# Altium PCB ControlBoard_v4.PcbDoc (part 2 of 2)
Units mm, origin at the board's own origin, x right, y up, seen from the top; angles counter-clockwise.
Board outline 111.5 x 182 mm, 2 copper layers (Top Layer, Bottom Layer); 154 components, 123 nets, 669 pads, 187 vias.
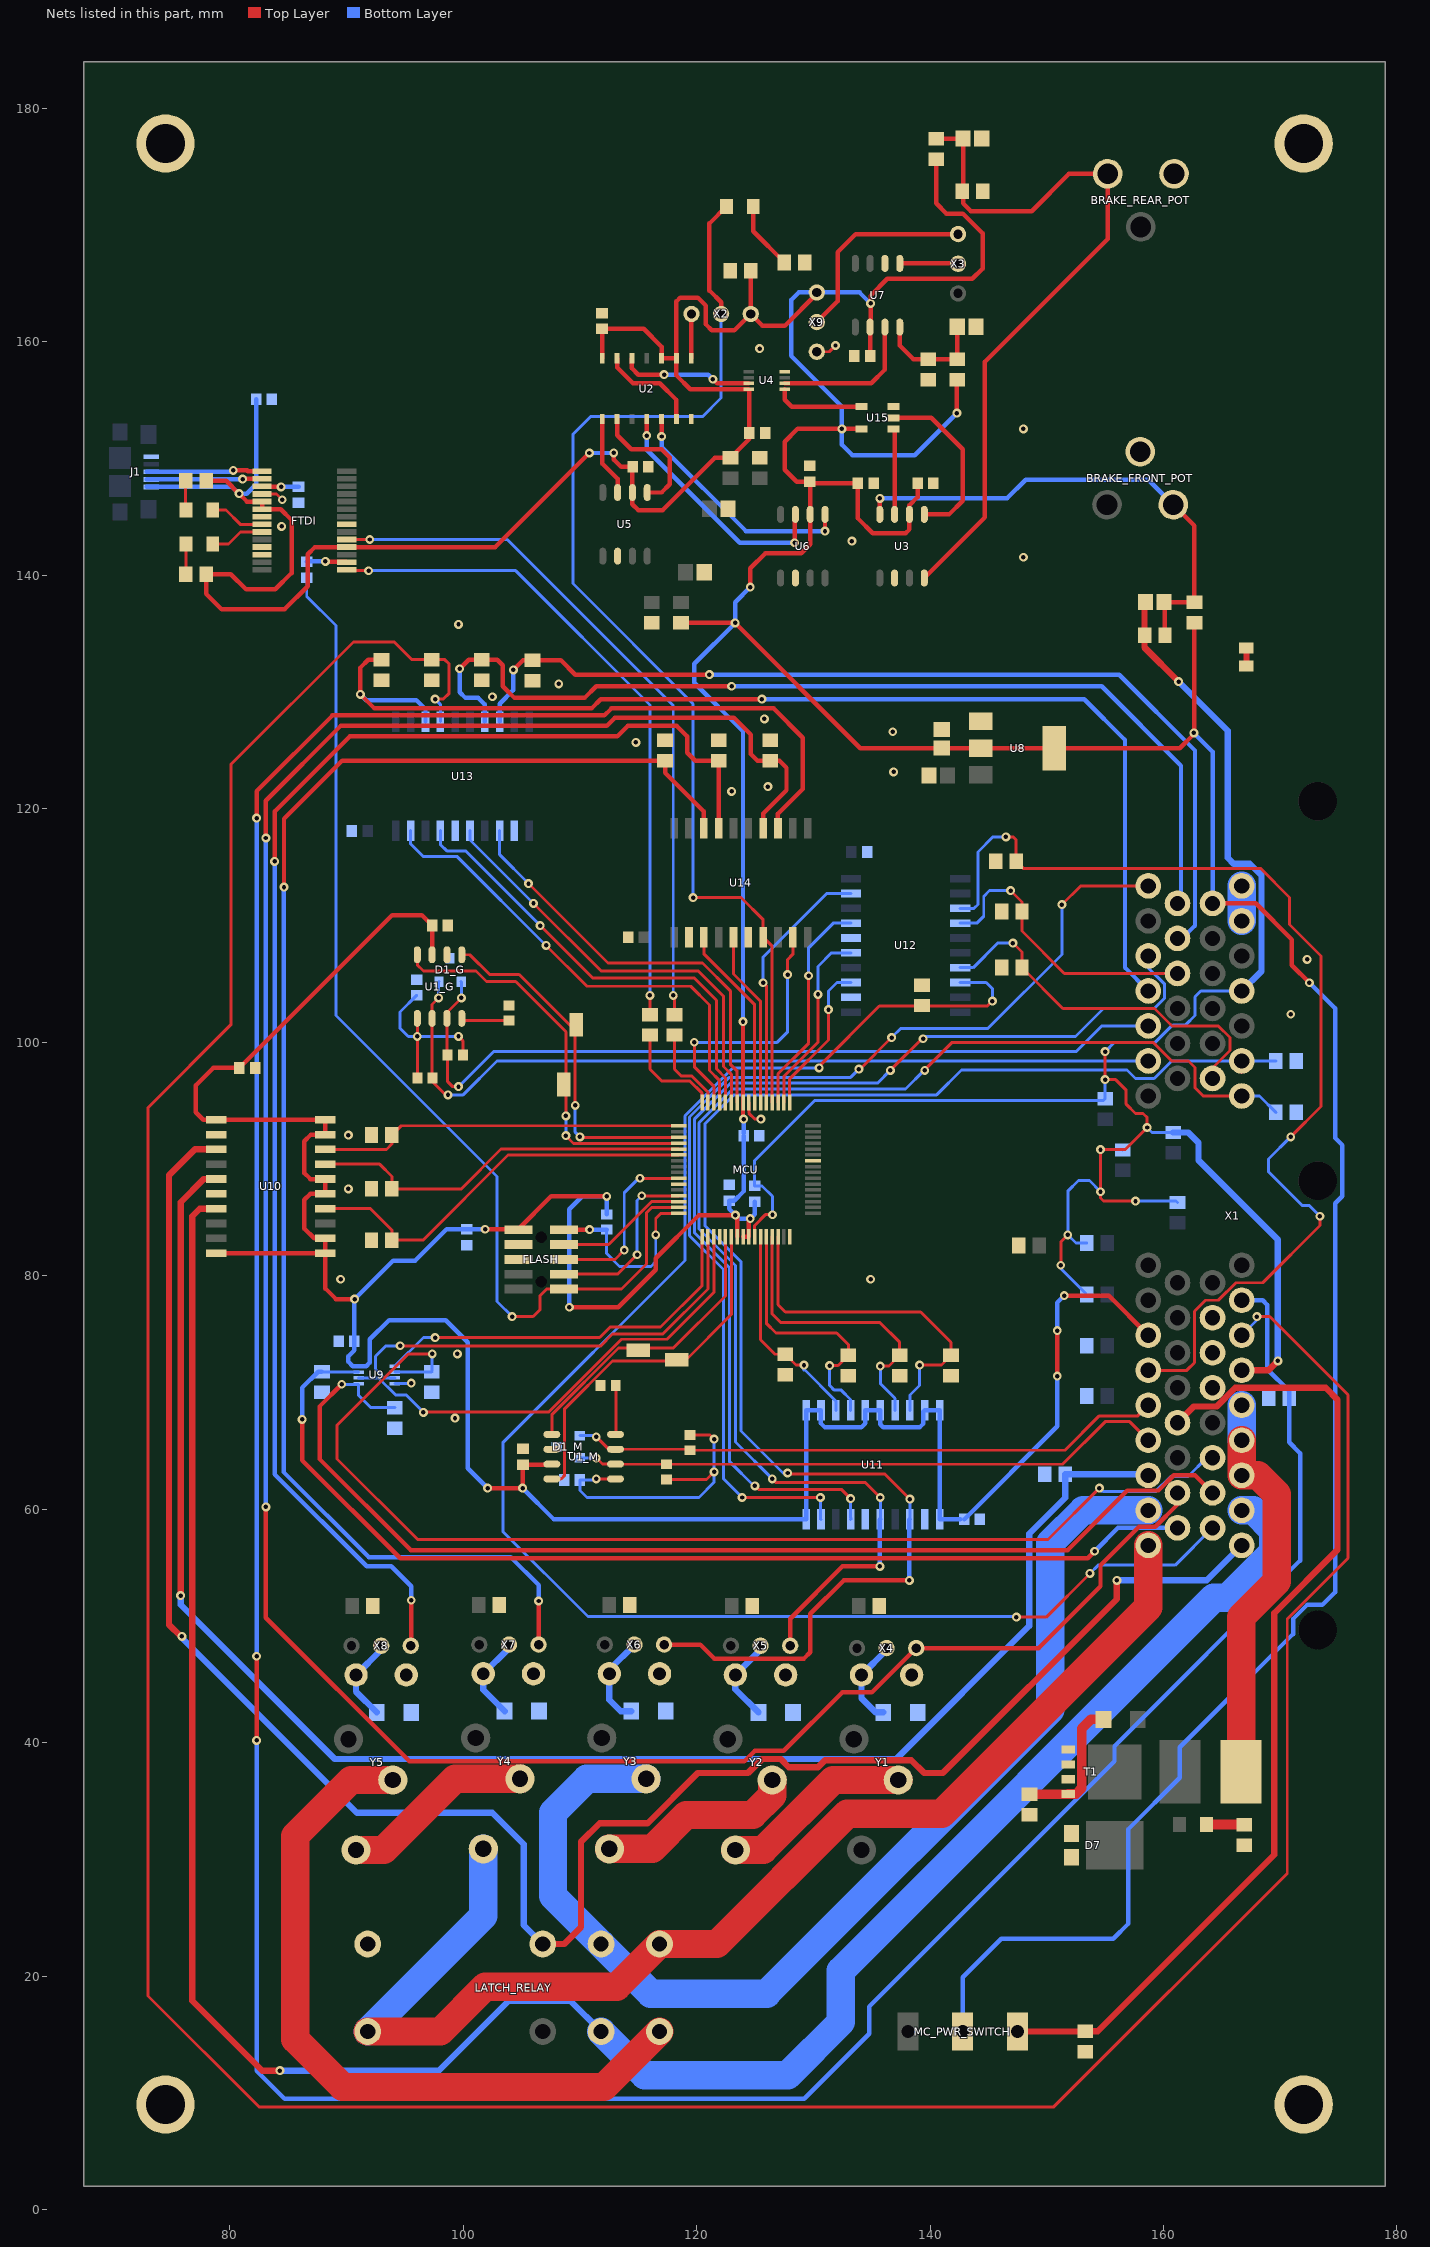
[diagram p2: the nets of this part, all layers, seen from the top]

## Via types
v1: diameter 0.762, hole 0.381, Top Layer to Bottom Layer, 185 vias
v2: diameter 2.54, hole 1.24, Top Layer to Bottom Layer, 2 vias

## Nets (pads, with @x,y where several pads share a name; then routed paths per layer and width w, separated by ;. In a path a pad name is that pad's centre, name@x,y a point inside that pad or via, vN(x,y) a via of type N, cw(c..) or ccw(c..) an arc to the next point about the centre after c; other vN are vias at no path point) (continued)
AGND: BRAKE_FRONT_POT.2 BRAKE_REAR_POT.3 C7.1 C12.1 C13.1 C14.1 C15.1 C17.1 C18.1 C19.1 C20.1 C21.1 C22.1 C29.1 C30.1 MCU.10 N1.2 R8.1 R9.1 R10.1 R11.1 R13.2 R14.1 R16.2 R17.1 R20.1 R22.1 R23.2 R25.1 R60.1 U2.7 U3.2 U4.4 U5.2 U6.2 U7.2 U15.3 X1.A31 X1.B23 X9.3 | length 169.8
  Top Layer w0.254: MCU.10@124.975,83.35 124.975,84.314 125.89,85.229 v1(126.5,85.229) ; X9.3@130.3,159.16 131.365,159.16 v1(131.9,159.695) ; v1(151.2,80.9) 151.2,82.9 v1(151.8,83.5) ; v1(155,99.2) v1(155,96.8) 155.9,96.8 156.8,95.9 156.8,94.7 157.6,93.9 158.25,93.9 158.6,93.55 v1(158.6,92.7) 156.7,90.8 v1(154.6,90.8) v1(154.6,87.2) 154.6,86.65 154.85,86.4 v1(157.6,86.4)
  Top Layer w0.543: C14.1@158.45,137.724 158.375,137.649 R10.1@158.375,134.874 158.375,133.825 v1(161.3,130.9) ; X1.A31@166.7,71.9 169,71.9 v1(169.8,72.7)
  Bottom Layer w0.254: v1(126.5,85.229) 126.5,86.8 125.61,87.69 C7.1@124.975,87.69 124.975,89.875 130.1,95 154.825,95 R14.1@155,95.175 v1(155,96.8) ; v1(151.2,80.9) 151.2,80.625 R23.2@153.425,78.4 ; R13.2@153.425,82.8 152.5,82.8 v1(151.8,83.5) 151.8,87.24 152.71,88.15 153.65,88.15 v1(154.6,87.2) ; v1(154.6,90.8) 156.475,90.8 R22.1@156.5,90.775 ; v1(155,99.2) 155.8,100 159.3,100 160.8,101.5 161.9,101.5 162.7,102.3 162.7,103.9 163.2,104.4 X1.B23@166.7,104.4 ; v1(157.6,86.4) 161.075,86.4 R16.2@161.2,86.275 ; v1(158.6,92.7) 159.025,92.275 R20.1@160.84,92.275
  Bottom Layer w0.543: R20.1@160.84,92.275 162.125,92.275 163,91.4 163,89.9 169.8,83.1 v1(169.8,72.7) ; v1@161.35,130.85 165.5,126.7 165.5,115.8 166,115.3 167.4,115.3 168.4,114.3 168.4,106.1 X1.B23@166.7,104.4
  other v1: 148,141.554 133.3,142.934 148,152.55 125.4,159.423
AIR+_5V: MCU.34 U12.5 | length 16.2
  Top Layer w0.254: MCU.34@127.475,94.85 127.475,97.075 130.4,100 v1(130.4,104.1)
  Bottom Layer w0.254: v1(130.4,104.1) 130.4,106.5 131.565,107.665 U12.5@133.225,107.665
AIR+_12V: R48.2 U12.17 X1.B14 | length 32.2
  Top Layer w0.254: v1(147.1,108.5) 147.875,107.725 R48.2@147.875,106.4 151.375,102.9 159.225,102.9 160.725,101.4 164.7,101.4 165.7,100.4 165.7,99.3 164.2,97.8 X1.B14@164.2,96.9
  Bottom Layer w0.254: U12.17@142.575,106.395 143.695,106.395 145.8,108.5 v1(147.1,108.5)
AIR-_5V: MCU.35 U12.7 | length 18.8
  Top Layer w0.254: MCU.35@126.975,94.85 126.975,97.3 129.6,99.925 v1(129.6,105.7)
  Bottom Layer w0.254: v1(129.6,105.7) 129.6,108.1 131.705,110.205 U12.7@133.225,110.205
AIR-_12V: R49.2 U12.14 X1.B11 | length 25.2
  Top Layer w0.254: v1(146.9,113) 147.875,112.025 R49.2@147.875,111.2 147.875,109.525 151.5,105.9 X1.B11@161.2,105.9
  Bottom Layer w0.254: U12.14@142.575,110.205 144.005,110.205 144.6,110.8 144.6,112.5 145.1,113 v1(146.9,113)
BMS_OK: R15.1 U11.5 X1.B20 X5.1 | length 116.6
  Top Layer w0.254: v1(126.48,62.6) 126.78,62.3 134.435,62.3 v1(135.735,61) ; v1(139.545,97.6) 139.545,97.645 141.9,100 159.1,100 160.7,98.4 162.15,98.4 162.7,97.85 162.7,96.1 163.4,95.4 X1.B20@166.7,95.4
  Top Layer w0.381: X5.1@128.015,48.3 128.015,50.615 132.5,55.1 v1(135.695,55.1)
  Bottom Layer w0.254: v1(126.48,62.6) 123.325,65.755 123.325,80.875 120.2,84 120.2,93.1 123.1,96 137.9,96 139.5,97.6 v1(139.545,97.6) ; U11.5@135.735,59.125 v1(135.735,61) ; X1.B20@166.7,95.4 168.225,95.4 R15.1@169.625,94
  Bottom Layer w0.381: v1(135.695,55.1) 135.695,59.085 U11.5@135.735,59.125
BMS_OK_5V: MCU.13 R44.2 U11.17 | length 26
  Top Layer w0.254: MCU.13@126.475,83.35 126.475,76.725 127.2,76 135.7,76 137.4,74.3 R44.2@137.4,73.175 136.49,72.265 v1(135.735,72.265)
  Bottom Layer w0.254: v1(135.735,72.265) 135.735,70.765 137.005,69.495 U11.17@137.005,68.475
BMS_OK_OUT: D2.2 X5.2 Y2.COIL1 | length 7.4
  Bottom Layer w0.543: D2.2@125.3,42.6 123.325,44.575 Y2.COIL1@123.325,45.8 125.475,47.95 X5.2@125.475,48.3
BRAKE_FRONT_POT: BRAKE_FRONT_POT.1 C14.2 R4.1 R10.2 U3.8 | length 42.6
  Top Layer w0.381: U3.8@135.695,145.225 135.7,145.23 v1(135.7,146.6) ; C14.2@160.05,137.724 C14.2@160.075,137.699 ; R10.2@160.125,134.874 160.125,137.649 C14.2@160.075,137.699 ; BRAKE_FRONT_POT.1@160.84,146.055 162.65,144.245 R4.1@162.65,137.699 C14.2@160.075,137.699
  Bottom Layer w0.381: v1(135.7,146.6) 146.6,146.6 148.2,148.2 158.695,148.2 BRAKE_FRONT_POT.1@160.84,146.055
BRAKE_REAR_POT: BRAKE_REAR_POT.1 C15.2 R5.1 R11.2 U3.4 | length 63.1
  Top Layer w0.381: U3.4@139.505,139.775 144.7,144.97 144.7,158.3 155.22,168.82 BRAKE_REAR_POT.1@155.22,174.4 151.9,174.4 148.7,171.2 143.5,171.2 142.825,171.875 R11.2@142.825,172.9 ; R5.1@140.525,177.4 142.8,177.4 C15.2@142.825,177.425 R11.2@142.825,172.9 ; R11.2@142.75,172.825 R11.2@142.825,172.9
BRK_LIGHT_OUT: R47.2 U12.18 X1.A18 | length 143.6
  Top Layer w0.254: v1(130.5,97.8) 130.5,97.95 135.65,103.1 144.9,103.1 v1(145.335,103.535) ; v1(147.4,50.75) 149.95,50.75 v1(153.7,54.5)
  Bottom Layer w0.254: v1(130.5,97.8) 123.1,97.8 119,93.7 119,81.3 103.4,65.7 103.4,58.1 110.7,50.8 v1@147.4,50.8 ; U12.18@142.575,105.125 144.81,105.125 145.335,104.6 v1(145.335,103.535) ; v1(153.7,54.5) 154.4,55.2 161,55.2 X1.A18@164.2,58.4
BRK_LIT_5V: MCU.33 U12.3 | length 13.2
  Top Layer w0.254: MCU.33@127.975,94.85 127.975,96.875 131.3,100.2 v1(131.3,102.8)
  Bottom Layer w0.254: v1(131.3,102.8) 131.3,104.4 132.025,105.125 U12.3@133.225,105.125
BSPD_OK_5V: D8.1 MCU.36 U14.7 X2.2 | length 98.1
  Top Layer w0.254: v1(119.7,112.4) 123.8,112.4 125.7,110.5 U14.7@125.7,109 126.475,108.225 MCU.36@126.475,94.85
  Top Layer w0.381: X2.2@122.1,162.4 122.1,163.4 121.1,164.4 121.1,170.15 D8.1@122.55,171.6
  Bottom Layer w0.254: v1(119.7,112.4) 119.7,129 109.4,139.3 109.4,152.1 110.9,153.6 120.5,153.6 122.1,155.2 X2.2@122.1,162.4
BSPD_OK_12V: R56.2 U14.14 X1.A11 X4.1 | length 220.6
  Top Layer w0.381: v1(83.1,60.2) 83.1,50.7 95.4,38.4 124.1,38.4 125,39.3 127.475,39.3 132.475,44.3 135.015,44.3 X4.1@138.815,48.1 149.3,48.1 154.6,53.4 154.6,55.2 157.9,58.5 159.3,58.5 161.2,60.4 X1.A11@161.2,61.4 ; v1(83.1,117.5) 83.1,120.7 89.5,127.1 112.3,127.1 113,127.8 123.2,127.8 124.64,126.36 124.64,124.7 125.215,124.125 R56.2@126.3,124.125 127.1,124.125 127.7,123.525 127.7,121.6 125.7,119.6 U14.14@125.7,118.35
  Bottom Layer w0.381: v1(83.1,60.2) v1(83.1,117.5)
BSPD_OK_OUT: D1.2 X4.2 Y1.COIL1 | length 7.6
  Bottom Layer w0.543: D1.2@136,42.6 135.325,42.6 134.125,43.8 Y1.COIL1@134.125,45.8 136.275,47.95 X4.2@136.275,48.1
C_LOW: U7.1 X3.2 | length 5
  Top Layer w0.381: U7.1@137.405,166.725 142.375,166.725 X3.2@142.4,166.7
CAN_GEN_H: D1_M.1 R3_M.2 U1_M.7 X1.A5 | length 50.8
  Top Layer w0.254: v1(111.4,66.2) 112.465,65.135 U1_M.7@113.05,65.135 119.34,65.135 R3_M.2@119.425,65.05 151.55,65.05 154.5,68 157.8,68 X1.A5@158.7,68.9
  Bottom Layer w0.254: D1_M.1@110,66.3 111.3,66.3 v1(111.4,66.2)
CAN_GEN_L: D1_M.2 R2_M.1 U1_M.6 X1.A4 | length 51.1
  Top Layer w0.254: v1(111.4,64.4) 111.935,63.865 U1_M.6@113.05,63.865 113.065,63.85 R2_M.1@117.425,63.85 151.35,63.85 155,67.5 157.1,67.5 X1.A4@158.7,65.9
  Bottom Layer w0.254: D1_M.2@110,64.4 v1(111.4,64.4)
CAN_MC_H: D1_G.1 R3_G.2 U1_G.7 X1.B3 | length 71.5
  Top Layer w0.254: v1(99.6,96.2) 99.1,96.2 98.675,96.625 R3_G.2@98.675,98.9 98.61,98.965 U1_G.7@98.61,102.05 98.61,102.56 v1(99.85,103.8)
  Bottom Layer w0.254: v1(99.6,96.2) 102.6,99.2 152.5,99.2 154.7,101.4 X1.B3@158.7,101.4 ; D1_G.1@99.825,105.2 99.85,105.175 v1(99.85,103.8)
CAN_MC_L: D1_G.2 R2_G.1 U1_G.6 X1.B2 | length 73
  Top Layer w0.254: v1(97.9,103.8) 97.34,103.24 U1_G.6@97.34,102.05 97.34,96.985 R2_G.1@97.375,96.95 97.375,96.625 98.7,95.3 v1(98.7,95.5)
  Bottom Layer w0.254: v1(97.9,103.8) 97.9,105.175 D1_G.2@97.925,105.2 ; v1(98.7,95.5) 100,95.5 102.9,98.4 158.1,98.4 158.7,99 X1.B2@158.7,98.4
D_N: FTDI.16 J1.2 | length 9.7
  Top Layer w0.381: v1(81.1,148.25) 81.125,148.275 FTDI.16@82.575,148.275
  Bottom Layer w0.381: J1.2@72.9,148.225 81.075,148.225 v1(81.1,148.25)
D_P: FTDI.15 J1.3 | length 9.8
  Top Layer w0.381: v1(80.3,149) 81.485,149 81.559,148.925 FTDI.15@82.575,148.925
  Bottom Layer w0.381: J1.3@72.9,148.875 80.175,148.875 v1(80.3,149)
DCDC_DIS_5V: MCU.45 U13.9 | length 41.2
  Top Layer w0.254: v1(107.1,108.3) 110.6,104.8 119.5,104.8 121.1,103.2 121.1,97.575 121.975,96.7 MCU.45@121.975,94.85
  Bottom Layer w0.254: U13.9@95.505,118.125 95.505,116.995 96.6,115.9 99.5,115.9 v1(107.1,108.3)
DCDC_DIS_12V: R53.2 U13.13 X1.B4 | length 101.6
  Top Layer w0.381: R53.2@93,132.775 91.875,132.775 91.2,132.1 v1(91.2,129.8) 92.4,128.6 111,128.6 111.8,129.4 v1(125.6,129.4)
  Bottom Layer w0.381: v1(91.2,129.8) 91.7,129.3 96,129.3 96.775,128.525 U13.13@96.775,127.475 ; v1(125.6,129.4) 153.2,129.4 156.7,125.9 156.7,106.4 X1.B4@158.7,104.4
DGND: C1_G.1 C1_M.1 C2_G.1 C2_M.1 C3.1 C4.1 C5.1 C6.1 C8.1 C10.1 C11.1 C23.1 C24.2 C25.2 C26.1 C27.1 C28.1 D1.1 D1_G.3 D1_M.3 D2.1 D3.1 D4.1 D5.1 D7.1 D7.2 FLASH.3 FLASH.5 FTDI.7 FTDI.18 FTDI.21 FTDI.25 FTDI.26 J1.5 LATCH_RELAY.1 MCU.40 MCU.59 N1.1 pad.6 pad.7 pad.8 pad.9 R1_G.1 R1_M.1 R12.2 R15.2 R18.2 R19.2 R21.2 R24.2 R26.1 R27.1 R28.1 R29.1 R31.1 R32.1 R37.1 R38.1 R39.1 R40.1 R41.1 R42.1 R43.2 R44.1 R45.1 R46.1 R47.1 R48.1 R49.1 R50.1 R51.1 R52.1 R53.1 R54.1 R55.1 R56.1 R57.1 R58.1 R61.1 R62.1 T1.1 T1.2 T1.3 U1_G.2 U1_M.2 U8.1 U9.4 U10.2 U10.6 U11.2 U11.6 U12.2 U12.6 U13.2 U13.6 U14.2 U14.6 X1.A22 X1.A23 X1.A24 X1.B25 X1.B26 Y1.COIL2 Y2.COIL2 Y3.COIL2 Y4.COIL2 Y5.COIL2 | length 8.8
  Top Layer w0.254: FTDI.18@82.775,146.975 84.001,146.975 v1(84.5,146.476) ; MCU.40@124.475,94.85 124.475,93.925 124.975,93.425 v1(125.5,93.425)
  Bottom Layer w0.254: U9.4@94.15,70.75 95.5,70.75 v1(95.55,70.8)
  Bottom Layer w0.543: X1.B25@166.7,110.4 X1.B25@167,110.4
  Bottom Layer w2.43: X1.B25@166.7,110.4 X1.B26@166.7,113.4
  other v1: 99.3,67.8 99.5,73.3 89.5,79.7 134.9,79.7 90.175,87.447 90.175,92.05 170.9,102.4 172.3,107.1 123,121.5 126.1,121.9 136.875,123.169 114.8,125.7 136.8,126.6 125.8,127.7 102.5,129.6 108.187,130.7 99.6,135.8 84.445,144.2
DSCHRG_5V: MCU.43 U13.5 | length 37.4
  Top Layer w0.254: v1(106.025,111.9) 111.825,106.1 120.15,106.1 122.3,103.95 122.3,97.935 122.975,97.26 MCU.43@122.975,94.85
  Bottom Layer w0.254: U13.5@100.585,118.125 100.585,117.34 v1(106.025,111.9)
DSCHRG_12V: R51.2 U13.17 X1.B13 | length 85.7
  Top Layer w0.381: v1(99.7,132) 100.475,132.775 R51.2@101.6,132.775 102.925,132.775 103.4,132.3 103.4,130.5 104.4,129.5 110.4,129.5 111.4,130.5 v1(123,130.5)
  Bottom Layer w0.381: v1(99.7,132) 99.7,130 100.2,129.5 101.3,129.5 101.855,128.945 U13.17@101.855,127.475 ; v1(123,130.5) 154.7,130.5 161.5,123.7 161.5,112.2 X1.B13@161.2,111.9
DVCC: C1_G.2 C1_M.2 C4.2 C5.2 C6.2 C7.2 C8.2 C10.2 C17.2 C18.2 C19.2 C20.2 C21.2 C22.2 C23.2 C24.1 C25.1 C30.2 FLASH.1 FTDI.4 FTDI.19 FTDI.20 J1.1 MC_PWR_SWITCH.2 MCU.7 MCU.8 MCU.9 MCU.41 R4.2 R5.2 R6.2 R7.2 R17.2 R30.2 R35.2 R36.2 R59.2 U1_G.3 U1_M.3 U2.9 U2.10 U2.14 U3.6 U4.8 U5.6 U6.6 U7.6 U8.2 U8.THM U9.8 U10.1 U10.10 U10.11 U10.12 U10.15 U10.16 U10.19 U10.20 U11.1 U11.10 U11.11 U11.12 U11.15 U11.16 U11.19 U11.20 U15.5 X1.A7 X1.B19 X2.3 X9.1 | length 783.9
  Top Layer w0.384: R36.2@77.975,148.1 79.7,148.1 v1(80.8,147) 81.475,146.325 FTDI.19@82.775,146.325 FTDI.20@82.775,145.675 84.372,145.675 85.3,144.747 85.3,140.2 83.9,138.8 81.4,138.8 80.1,140.1 R35.2@77.975,140.1 77.975,138.425 79.3,137.1 84.7,137.1 86.675,139.075 86.675,141.8 87.3,142.425 FTDI.4@90.025,142.425 102.755,142.425 v1(110.815,150.485) ; U10.10@78.85,81.935 U10.11@88.2,81.935 ; v1(90.7,78) 89.1,78 88.2,78.9 U10.11@88.2,81.935 ; U1_G.3@97.34,107.5 97.35,107.51 C1_G.2@97.35,110 96.45,110.9 93.925,110.9 C24.1@80.825,97.8 78.6,97.8 77.1,96.3 77.1,94 77.735,93.365 U10.1@78.85,93.365 U10.20@88.2,93.365 U10.19@88.2,92.095 86.96,92.095 86.4,91.535 86.4,88.8 86.915,88.285 U10.16@88.2,88.285 U10.15@88.2,87.015 86.915,87.015 86.4,86.5 86.4,84.04 87.235,83.205 U10.12@88.2,83.205 U10.11@88.2,81.935 ; v1(101.88,83.98) 104.71,83.98 107.53,86.8 v1(112.3,86.8) ; v1(102.1,61.8) v1(105.1,61.8) 105.125,61.825 C1_M.2@105.125,63.825 107.56,63.825 U1_M.3@107.6,63.865 ; v1(109.1,77.3) 113.3,77.3 116.5,80.5 116.5,81.5 120.2,85.2 v1(123.325,85.2) 123.475,85.05 MCU.7@123.475,83.35 ; U2.14@111.92,158.6 111.9,158.62 C30.2@111.9,161.125 115.47,161.125 117,159.595 U2.10@117,158.6 U2.9@118.27,158.6 ; v1(112.9,150.5) 112.9,149.925 113.525,149.3 C21.2@114.525,149.3 114.5,149.275 U5.6@114.5,147.1 114.5,146.1 115,145.6 117.1,145.6 121.575,150.075 R6.2@122.9,150.075 124.525,151.7 C17.2@124.525,152.2 124.525,155.875 U4.8@124.45,155.95 119.45,155.95 118.27,157.13 U2.9@118.27,158.6 ; R7.2@118.665,135.925 v1(123.3,135.925) 134.025,125.2 C4.2@141,125.2 U8.2@144.35,125.2 U8.THM@150.65,125.2 161.4,125.2 162.65,126.45 R4.2@162.65,135.949 ; MCU.8@123.975,83.35 MCU.9@124.475,83.35 124.475,84.775 v1(124.6,84.9) ; v1(123.975,101.775) MCU.41@123.975,94.85 123.975,93.475 v1(124.025,93.425) ; v1(124.6,139) 124.6,140.6 125.9,141.9 128.975,141.9 129.735,142.66 U6.6@129.735,145.225 C22.2@129.735,147.99 ; R17.2@124.64,166.1 X2.3@124.64,162.4 ; X9.1@130.3,164.24 130.3,164.135 127.565,161.4 125.64,161.4 X2.3@124.64,162.4 ; U15.5@134.125,152.55 v1(132.45,152.55) 128.65,152.55 127.55,151.45 127.55,149.05 128.575,148.025 C22.2@129.7,148.025 C22.2@129.735,147.99 ; C20.2@134.875,158.8 134.865,158.81 U7.6@134.865,161.275 134.9,161.31 v1(134.9,163.3) 134.9,163.965 136.335,165.4 143.625,165.4 144.5,166.275 144.5,169.3 142.8,171 141.4,171 140.525,171.875 R5.2@140.525,175.65 ; C19.2@138.925,147.9 138.925,146.71 138.235,146.02 U3.6@138.235,145.225 138.235,143.935 137.9,143.6 135.1,143.6 133.825,144.875 C18.2@133.825,147.9 129.825,147.9 C22.2@129.735,147.99 ; v1(142.3,153.9) 142.3,156.74 R59.2@142.335,156.775 ; v1(150.9,71.4) v1(150.9,75.3) ; v1(151.5,78.3) 155.3,78.3 X1.A7@158.7,74.9 ; X1.B19@164.2,111.9 167.9,111.9 171,108.8 171,106.6 v1(172.5,105.1) ; U2.9@118.27,158.6 118.27,163.47 118.6,163.8 120.1,163.8 120.8,163.1 120.8,161.5 121.3,161 123.24,161 X2.3@124.64,162.4
  Bottom Layer w0.384: J1.1@72.9,147.575 80.225,147.575 v1(80.8,147) 81.46,147 82.26,147.8 C10.2@82.26,155.1 ; v1(101.88,83.98) C5.2@100.3,83.98 98.58,83.98 95.9,81.3 94,81.3 v1(90.7,78) 90.675,77.975 C23.2@90.675,74.4 90.675,73.6 90.175,73.1 90.175,72.625 90.55,72.25 U9.8@91.05,72.25 91.685,72.25 92,72.565 92,74.55 93.65,76.2 98.5,76.2 100.4,74.3 100.4,63.5 v1(102.1,61.8) ; v1(105.1,61.8) 107.775,59.125 U11.10@129.385,59.125 U11.11@129.385,68.475 U11.12@130.655,68.475 130.655,67.345 131,67 134.1,67 134.465,67.365 U11.15@134.465,68.475 U11.16@135.735,68.475 135.735,67.265 136,67 139.1,67 139.4,67.3 139.4,68.33 U11.19@139.545,68.475 U11.20@140.815,68.475 U11.1@140.815,59.125 C25.1@142.575,59.125 ; v1(109.1,77.3) 109.1,85.7 110.2,86.8 v1(112.3,86.8) R30.2@112.3,85.25 ; v1(110.815,150.485) 112.885,150.485 v1(112.9,150.5) ; v1(123.975,101.775) 123.975,126.625 119.8,130.8 119.8,132.425 v1(123.3,135.925) 123.3,137.7 v1(124.6,139) ; C8.2@124.025,92 124.025,87.225 123.225,86.425 C6.2@122.8,86.425 122.8,85.725 v1(123.325,85.2) 123.625,84.9 v1(124.6,84.9) 124.975,85.275 C7.2@124.975,86.34 ; C8.2@124.025,92.2 v1(124.025,93.425) ; v1(134.9,163.3) 133.96,164.24 X9.1@130.3,164.24 128.74,164.24 128.1,163.6 128.1,158.8 132.45,154.45 v1(132.45,152.55) 132.45,151.2 133.35,150.3 138.7,150.3 v1(142.3,153.9) ; MC_PWR_SWITCH.2@142.8,15.25 142.8,19.9 146.1,23.2 155.7,23.2 157,24.5 157,32.6 161.4,37 161.4,39.6 171.1,49.3 171.1,50.6 172.3,51.8 173.6,51.8 174.7,52.9 174.7,86.2 175.3,86.8 175.3,91.2 174.7,91.8 174.7,102.9 v1(172.5,105.1) ; C25.1@142.925,59.125 150.9,67.1 v1(150.9,71.4) ; v1(150.9,75.3) 150.9,77.7 v1(151.5,78.3) ; v1(162.6,126.5) 164.2,124.9 X1.B19@164.2,111.9
FAN_EN: MCU.2 U9.3 | length 38.4
  Top Layer w0.254: v1(94.6,74) 111.8,74 112.8,75 117.1,75 120.975,78.875 MCU.2@120.975,83.35
  Bottom Layer w0.254: U9.3@94.15,71.25 93.25,71.25 92.5,72 92.5,73.1 93.4,74 v1(94.6,74)
FAN_EN_OUT: R39.2 U9.5 X1.A19 | length 96.1
  Top Layer w0.381: v1(89.6,70.7) 87.7,68.8 87.7,64.3 95.5,56.5 151.8,56.5 156.903,61.603 159.57,61.603 160.866,62.9 162.7,62.9 X1.A19@164.2,61.4
  Bottom Layer w0.254: v1(89.6,70.7) 91.05,70.7 91.05,69.75 92.1,68.7 R39.2@94.15,68.7
FAN_PWM: MCU.1 U9.1 | length 33.4
  Top Layer w0.254: v1(97.6,74.7) 111.7,74.7 112.6,75.6 116.9,75.6 120.475,79.175 MCU.1@120.475,83.35
  Bottom Layer w0.254: U9.1@94.15,72.25 96.6,74.7 v1(97.6,74.7)
FAN_PWM_OUT: R57.2 U9.7 X1.A10 | length 91.2
  Top Layer w0.381: v1(86.2,67.7) 86.2,64.2 94.6,55.8 153.5,55.8 v1(154.1,56.4)
  Bottom Layer w0.254: R57.2@87.9,71.775 87.925,71.75 U9.7@91.05,71.75
  Bottom Layer w0.381: v1(86.2,67.7) 86.2,70.4 87.575,71.775 R57.2@87.9,71.775 ; v1(154.1,56.4) 156.1,58.4 X1.A10@161.2,58.4
FTDI_GREEN: FTDI.23 FTDI_GRN.2 | length 4.6
  Top Layer w0.254: FTDI_GRN.2@78.55,142.7 79.9,142.7 80.925,143.725 FTDI.23@82.775,143.725
FTDI_RED: FTDI.22 FTDI_RED.2 | length 4.7
  Top Layer w0.254: FTDI_RED.2@78.55,145.6 79.675,145.6 80.9,144.375 FTDI.22@82.775,144.375
FTDI_UART_RX: MCU.47 R34.2 | length 7.5
  Top Layer w0.254: R34.2@118.1,100.625 118.1,97.7 118.7,97.1 119.6,97.1 120.975,95.725 MCU.47@120.975,94.85
FTDI_UART_TX: MCU.48 R33.2 | length 9
  Top Layer w0.254: R33.2@116,100.625 116,97.7 117,96.7 119.4,96.7 120.475,95.625 MCU.48@120.475,94.85
GEN1_OUT: R61.2 U12.13 X1.A6 | length 92.3
  Top Layer w0.254: v1(146.5,117.6) 147.1,117.6 147.375,117.325 R61.2@147.375,115.5 147.975,114.9 168.3,114.9 170.8,112.4 170.8,110.1 173.5,107.4 173.5,94.5 v1(170.9,91.9) ; X1.A6@158.7,71.9 162,71.9 162.65,72.55 162.65,76.95 163.6,77.9 164.7,77.9 166.2,79.4 168.5,79.4 173.4,84.3 v1(173.4,85.1)
  Bottom Layer w0.254: U12.13@142.575,111.475 143.775,111.475 144.1,111.8 144.1,116.3 145.4,117.6 v1(146.5,117.6) ; v1(170.9,91.9) 169,90 169,88.9 171.9,86 172.5,86 v1(173.4,85.1)
GEN2_OUT: R62.2 U14.13 X1.A33 | length 306.4
  Top Layer w0.381: v1(82.3,40.2) v1(82.3,47.4) ; v1(82.3,119.2) 82.3,121.5 88.8,128 112.1,128 112.7,128.6 126.6,128.6 129.1,126.1 129.1,121.7 126.97,119.57 U14.13@126.97,118.35
  Top Layer w0.543: X1.A33@166.7,77.6 X1.A33@166.7,77.9
  Bottom Layer w0.381: v1(82.3,40.2) 82.3,11.9 84.7,9.5 129.232,9.5 134.791,15.059 134.791,17.391 155.8,38.4 155.8,39.7 171.7,55.6 171.7,64.8 170.775,65.725 R62.2@170.775,69.5 170.775,70.125 168.9,72 168.9,77.5 168.5,77.9 X1.A33@166.7,77.9 ; v1(82.3,47.4) v1(82.3,119.2)
GEN_PURP_1_5V: MCU.37 U12.9 | length 22.4
  Top Layer w0.254: v1(125.7,105.1) 126,104.8 126,94.875 MCU.37@125.975,94.85
  Bottom Layer w0.254: v1(125.7,105.1) 125.7,107.3 131.145,112.745 U12.9@133.225,112.745
GEN_PURP_2_5V: MCU.46 U14.9 | length 22.5
  Top Layer w0.254: v1(119.8,100) 119.8,97.9 121.475,96.225 MCU.46@121.475,94.85 ; v1(127.8,105.8) 127.8,107.1 128.24,107.54 U14.9@128.24,109
  Bottom Layer w0.254: v1(119.8,100) 126.9,100 127.8,100.9 v1(127.8,105.8)
GEN_RX: MCU.52 TP4.1 U1_G.4 | length 34.8
  Top Layer w0.254: U1_G.4@96.07,107.5 96.07,106.63 96.6,106.1 101.1,106.1 102,105.2 104.5,105.2 108.8,100.9 v1(108.8,93.7) ; v1(108.8,92) 109.464,91.336 118.461,91.336 MCU.52@118.475,91.35
  Bottom Layer w0.254: v1(108.8,92) v1(108.8,93.7)
GEN_TX: MCU.51 TP3.1 U1_G.1 | length 30.2
  Top Layer w0.254: U1_G.1@99.88,107.5 100.575,107.5 102.275,105.8 104.8,105.8 109.6,101 v1(109.6,94.6) ; v1(110,91.9) 110.05,91.85 MCU.51@118.475,91.85
  Bottom Layer w0.254: v1(109.6,94.6) 109.6,92.3 v1(110,91.9)
IMD_OK: R12.1 U11.3 X1.B21 X6.1 | length 130.5
  Top Layer w0.254: v1(127.8,63.1) 127.9,63 136.135,63 v1(138.275,60.86) ; X1.B21@166.7,97.4 X1.B21@166.7,98.4
  Top Layer w0.381: X6.1@117.215,48.4 120.3,48.4 121.5,47.2 129.2,47.2 129.735,47.735 129.735,51.035 132.6,53.9 v1(138.235,53.9)
  Bottom Layer w0.254: v1(127.8,63.1) 127.4,63.1 123.8,66.7 123.8,81.2 120.7,84.3 120.7,93 123.2,95.5 140.565,95.5 142.7,97.635 156.865,97.635 157.6,96.9 159.2,96.9 160.7,98.4 X1.B21@166.7,98.4 R12.1@169.625,98.4 ; U11.3@138.275,59.125 v1(138.275,60.86)
  Bottom Layer w0.381: v1(138.235,53.9) 138.235,59.085 U11.3@138.275,59.125
IMD_OK_5V: MCU.14 R43.1 U11.18 | length 30.4
  Top Layer w0.254: MCU.14@126.975,83.35 126.975,77.525 127.6,76.9 139.2,76.9 141.8,74.3 R43.1@141.8,73.175 140.975,72.35 v1(139.1,72.35)
  Bottom Layer w0.254: U11.18@138.275,68.475 138.275,69.775 139.1,70.6 v1(139.1,72.35)
IMD_OK_OUT: D3.2 X6.2 Y3.COIL1 | length 7.9
  Bottom Layer w0.543: D3.2@114.4,42.7 113.5,42.7 112.525,43.675 Y3.COIL1@112.525,45.9 112.525,46.25 X6.2@114.675,48.4
JTAG_TCLK: FLASH.4 MCU.62 | length 11.3
  Top Layer w0.254: FLASH.4@108.65,82.67 112.47,82.67 116.15,86.35 MCU.62@118.475,86.35
JTAG_TDI: FLASH.8 MCU.61 | length 15.3
  Top Layer w0.254: FLASH.8@108.65,80.13 113.23,80.13 v1(114.9,81.8) ; v1(115.3,86.85) MCU.61@118.475,86.85
  Bottom Layer w0.254: v1(114.9,81.8) 114.9,86.45 v1(115.3,86.85)
JTAG_TDO: FLASH.6 MCU.58 | length 15.6
  Top Layer w0.254: FLASH.6@108.65,81.4 113,81.4 v1(113.8,82.2) ; v1(115.15,88.35) MCU.58@118.475,88.35
  Bottom Layer w0.254: v1(113.8,82.2) 113.8,87.1 115.05,88.35 v1(115.15,88.35)
JTAG_TMS: FLASH.2 MCU.64 R30.1 | length 16.4
  Top Layer w0.254: v1(116.5,83.5) 116.5,84.9 116.95,85.35 MCU.64@118.475,85.35
  Top Layer w0.381: FLASH.2@108.65,83.94 108.66,83.95 v1(110.83,83.95)
  Bottom Layer w0.254: R30.1@112.3,83.95 112.3,81.9 113.4,80.8 116.1,80.8 116.5,81.2 v1(116.5,83.5)
  Bottom Layer w0.381: v1(110.83,83.95) R30.1@112.3,83.95
LATCH_SENSE_OUT: MCU.49 R42.2 U10.18 | length 31.6
  Top Layer w0.254: U10.18@88.2,90.825 93.425,90.825 93.9,91.3 R42.2@93.9,92.05 94.7,92.85 MCU.49@118.475,92.85
LTCH_BTN_IN: LATCH_RELAY.4 LATCH_RELAY.8 X1.A1 Y4.COM | length 107
  Top Layer w2.43: LATCH_RELAY.8@91.821,15.25 98.05,15.25 101.9,19.1 113.171,19.1 LATCH_RELAY.4@116.821,22.75 121.75,22.75 132.9,33.9 141,33.9 158.7,51.6 X1.A1@158.7,56.9
  Bottom Layer w2.43: LATCH_RELAY.8@91.821,15.25 101.725,25.154 Y4.COM@101.725,30.9
LTCH_BTN_OUT: LATCH_RELAY.3 X1.A2 Y3.NO | length 96.3
  Bottom Layer w2.43: Y3.NO@115.675,36.9 110.6,36.9 107.7,34 107.7,26.871 LATCH_RELAY.3@111.821,22.75 116.071,18.5 126,18.5 150.3,42.8 150.3,57.1 153.1,59.9 X1.A2@158.7,59.9
LTCH_LED_12V: LATCH_RELAY.2 U10.3 X1.A26 | length 171.7
  Top Layer w0.542: v1(75.9,49.1) 75.8,49.1 74.8,50.1 74.8,88.6 77.025,90.825 U10.3@78.85,90.825 ; LATCH_RELAY.2@106.821,22.75 108.65,22.75 110.1,24.2 110.1,31.5 111.7,33.1 115.8,33.1 120.1,37.4 124.4,37.4 125.6,38.6 127.2,38.6 127.9,37.9 130.4,37.9 131,38.5 138.4,38.5 139.5,37.4 141.1,37.4 156,52.3 v1(156,53.9)
  Bottom Layer w0.542: v1(75.9,49.1) 75.9,49 90.9,34 102.5,34 105.2,31.3 105.2,24.371 LATCH_RELAY.2@106.821,22.75 ; v1(156,53.9) 163.7,53.9 X1.A26@166.7,56.9
MC_EN: R18.1 U10.5 X1.A3 | length 142.7
  Top Layer w0.543: v1(75.8,52.6) 75.8,86.3 77.785,88.285 U10.5@78.85,88.285
  Bottom Layer w0.543: v1(75.8,52.6) 75.8,51.8 89,38.6 137.1,38.6 148.5,50 148.5,57.9 151.575,60.975 R18.1@151.575,63 158.6,63 X1.A3@158.7,62.9
MC_EN_5V: MCU.53 R40.2 U10.17 | length 33.2
  Top Layer w0.254: U10.17@88.2,89.555 92.845,89.555 93.9,88.5 R40.2@93.9,87.45 99.85,87.45 103.25,90.85 MCU.53@118.475,90.85
MC_PWR: MC_PWR_SWITCH.1 R29.2 X1.A13 | length 84.9
  Top Layer w0.543: MC_PWR_SWITCH.1@147.5,15.25 153.275,15.25 R29.2@153.3,15.275 154.375,15.275 169.5,30.4 169.5,51.1 174.9,56.5 174.9,69.4 173.9,70.4 166.148,70.4 164.548,68.8 162.6,68.8 X1.A13@161.2,67.4
MC_RX: MCU.6 TP1.1 U1_M.4 | length 31.2
  Top Layer w0.254: U1_M.4@107.6,62.595 108.395,62.595 108.7,62.9 108.7,68.613 112.787,72.7 119,72.7 122.975,76.675 MCU.6@122.975,83.35
MC_TX: MCU.5 TP2.1 U1_M.1 | length 25.9
  Top Layer w0.254: U1_M.1@107.6,66.405 107.6,68.1 113.3,73.8 118,73.8 122.475,78.275 MCU.5@122.475,83.35
MCU_REDUN_1_OUT: R54.2 U14.18 X7.1 | length 128.8
  Top Layer w0.381: v1(84.653,113.3) 84.653,119.153 89.625,124.125 R54.2@117.3,124.125 117.3,123.1 120.62,119.78 U14.18@120.62,118.35 ; X7.1@106.465,48.4 v1(106.465,52.135)
  Bottom Layer w0.381: v1(84.653,113.3) 84.616,113.3 84.616,63.184 91.9,55.9 104.065,55.9 106.465,53.5 v1(106.465,52.135)
MCU_REDUN_2_OUT: R55.2 U14.17 X8.1 | length 126.5
  Top Layer w0.381: v1(83.854,115.5) 83.854,119.779 90.275,126.2 113.2,126.2 114.1,127.1 118.3,127.1 119.2,126.2 119.2,124.8 119.875,124.125 R55.2@121.9,124.125 121.89,124.115 U14.17@121.89,118.35 ; X8.1@95.515,48.3 95.55,48.335 v1(95.55,52.2)
  Bottom Layer w0.381: v1(83.854,115.5) 83.854,62.981 91.735,55.1 93.85,55.1 95.55,53.4 v1(95.55,52.2)
MCU_REDUNDANCY_1_OUT: D4.2 X7.2 Y4.COIL1 | length 7.4
  Bottom Layer w0.543: D4.2@103.55,42.7 101.725,44.525 Y4.COIL1@101.725,45.9 103.925,48.1 X7.2@103.925,48.4
MCU_REDUNDANCY_2_OUT: D5.2 X8.2 Y5.COIL1 | length 7.3
  Bottom Layer w0.543: D5.2@92.6,42.6 90.825,44.375 Y5.COIL1@90.825,45.8 92.975,47.95 X8.2@92.975,48.3
NetC2_GEN_2: C2_G.2 R2_G.2 R3_G.1 U1_G.5 | length 15.6
  Top Layer w0.254: U1_G.5@96.07,102.05 v1(96.07,100.5) 96.07,96.955 R2_G.2@96.075,96.95 ; v1(99.6,100.5) 99.975,100.125 R3_G.1@99.975,98.9
  Bottom Layer w0.254: C2_G.2@96.025,104.025 94.6,102.6 94.6,101.2 95.3,100.5 v1(96.07,100.5) v1(99.6,100.5)
NetC2_MC_2: C2_M.2 R2_M.2 R3_M.1 U1_M.5 | length 26.5
  Top Layer w0.254: v1(111.4,62.6) 111.405,62.595 U1_M.5@113.05,62.595 ; R2_M.2@117.425,62.55 120.85,62.55 v1(121.5,63.2) ; R3_M.1@119.425,66.35 121.15,66.35 v1(121.5,66)
  Bottom Layer w0.254: v1(111.4,62.6) 111.3,62.5 C2_M.2@110,62.5 110,61.6 110.6,61 120.2,61 121.5,62.3 v1(121.5,63.2) v1(121.5,66)
NetC9_1: C9.1 FTDI.2 | length 3.5
  Top Layer w0.381: v1(88.2,141.2) 88.221,141.179 89.971,141.179 FTDI.2@90.025,141.125
  Bottom Layer w0.381: C9.1@86.6,141.15 86.65,141.2 v1(88.2,141.2)
NetD6_1: D6.1 R31.2 T1.4 | length 12
  Top Layer w0.843: R31.2@148.525,35.575 151.805,35.575 T1.4@151.825,35.595 152.495,35.595 153,36.1 153,41.2 153.8,42 D6.1@154.85,42
NetD8_2: D8.2 R25.2 | length 5.9
  Top Layer w0.381: D8.2@124.85,171.6 124.85,169.475 R25.2@127.525,166.8
NetFTDI_1: FTDI.1 R33.1 | length 57.3
  Top Layer w0.254: FTDI.1@90.025,140.475 90.1,140.4 v1(91.9,140.4) ; R33.1@116,102.375 v1(116,104.025)
  Bottom Layer w0.254: v1(91.9,140.4) 104.5,140.4 116,128.9 v1(116,104.025)
NetFTDI_5: FTDI.5 R34.1 | length 60.4
  Top Layer w0.254: FTDI.5@90.025,143.075 v1(92,143.075) ; R34.1@118.1,102.375 v1@118.1,103.925
  Top Layer w0.543: v1(118,104.025) v1@118.1,103.925
  Bottom Layer w0.254: v1(92,143.075) 103.775,143.075 118,128.85 v1(118,104.025)
NetGRN_1: FTDI_GRN.1 R35.1 | length 2.6
  Top Layer w0.254: R35.1@76.225,140.1 76.25,140.125 FTDI_GRN.1@76.25,142.7
NetLATCH_RELAY_5: LATCH_RELAY.5 Y5.NO | length 62.7
  Top Layer w2.43: Y5.NO@93.975,36.8 90.4,36.8 85.6,32 85.6,14.6 89.7,10.5 112.071,10.5 LATCH_RELAY.5@116.821,15.25
NetMCU_4: MCU.4
NetMCU_16: MCU.16
NetMCU_26: MCU.26
NetR1_GEN_2: R1_G.2 U1_G.8 | length 4.1
  Top Layer w0.254: U1_G.8@99.88,102.05 100.08,101.85 R1_G.2@103.925,101.85
NetR1_MC_2: R1_M.2 U1_M.8 | length 4.2
  Top Layer w0.254: U1_M.8@113.05,66.405 113.075,66.43 R1_M.2@113.075,70.6
NetR32_2: R32.2 RVP_LED.2 | length 3.3
  Top Layer w0.843: RVP_LED.2@163.675,33 166.9,33 R32.2@166.925,32.975
NetR36_1: FTDI_RED.1 R36.1 | length 2.5
  Top Layer w0.254: R36.1@76.225,148.1 76.225,145.625 FTDI_RED.1@76.25,145.6
NetU2_1: U2.1 U5.7 | length 6.8
  Top Layer w0.381: U2.1@111.92,153.4 111.92,149.58 113.23,148.27 U5.7@113.23,147.1
NetU2_2: U2.2 U5.5 | length 11.2
  Top Layer w0.381: U2.2@113.19,153.4 113.19,152.01 114.4,150.8 117,150.8 117.7,150.1 117.7,147.8 117,147.1 U5.5@115.77,147.1
NetU2_4: U2.4 U6.7 | length 21.1
  Top Layer w0.381: v1(115.73,151.97) U2.4@115.73,153.4 ; v1(128.4,142.8) 128.4,145.16 U6.7@128.465,145.225
  Bottom Layer w0.381: v1(115.73,151.97) 115.73,150.77 123.7,142.8 v1(128.4,142.8)
NetU2_5: U2.5 U6.5 | length 20.8
  Top Layer w0.381: v1(117,151.9) U2.5@117,153.4 ; v1(131,143.8) 131,145.22 U6.5@131.005,145.225
  Bottom Layer w0.381: v1(117,151.9) 117,151.025 124.225,143.8 v1(131,143.8)
NetU2_6: U2.6 U2.13 | length 8.7
  Top Layer w0.381: U2.13@113.19,158.6 113.19,157.81 114.55,156.45 116.85,156.45 118.27,155.03 U2.6@118.27,153.4
NetU2_8: U2.8 X2.1 | length 3.8
  Top Layer w0.381: U2.8@119.54,158.6 119.56,158.62 X2.1@119.56,162.4
NetU2_12: U2.12 U4.7 | length 11.4
  Top Layer w0.381: U2.12@114.46,158.6 114.46,157.74 115,157.2 v1(117.215,157.2) ; v1(121.4,156.8) 121.75,156.45 U4.7@124.45,156.45
  Bottom Layer w0.381: v1(117.215,157.2) 121,157.2 v1(121.4,156.8)
NetU3_5: U3.5 U15.2 | length 15.2
  Top Layer w0.381: U15.2@136.875,153.5 140.1,153.5 142.8,150.8 142.8,146.4 141.625,145.225 U3.5@139.505,145.225
NetU3_7: U3.7 U15.1 | length 7.4
  Top Layer w0.381: U15.1@136.875,152.55 136.965,152.46 U3.7@136.965,145.225
NetU4_1: U4.1 U15.4 | length 7.7
  Top Layer w0.381: U4.1@127.55,155.95 127.55,155.05 128.15,154.45 U15.4@134.125,154.45
NetU4_2: U4.2 U7.7 | length 12.7
  Top Layer w0.381: U4.2@127.55,156.45 134.95,156.45 136.135,157.635 U7.7@136.135,161.275
NetX3_3: X3.3 X9.2 | length 17.7
  Top Layer w0.381: X9.2@130.3,161.7 132.1,163.5 132.1,167.7 133.64,169.24 X3.3@142.4,169.24
NetY1_NO: Y1.NO Y2.COM | length 16.4
  Top Layer w2.43: Y2.COM@123.325,30.8 125.7,30.8 131.7,36.8 Y1.NO@137.275,36.8
NetY2_NO: Y2.NO Y3.COM | length 17.2
  Top Layer w2.43: Y3.COM@112.525,30.9 116.2,30.9 119.1,33.8 124.8,33.8 126.475,35.475 Y2.NO@126.475,36.8
NetY4_NO: Y4.NO Y5.COM | length 16.6
  Top Layer w2.43: Y5.COM@90.825,30.8 93.2,30.8 99.3,36.9 Y4.NO@104.875,36.9
PRCHRG_5V: MCU.42 U13.3 | length 36.4
  Top Layer w0.254: v1(105.6,113.6) 112.4,106.8 120.5,106.8 122.89,104.41 122.89,98.11 123.475,97.525 MCU.42@123.475,94.85
  Bottom Layer w0.254: U13.3@103.125,118.125 103.125,116.075 v1(105.6,113.6)
PRCHRG_12V: R50.2 U13.18 X1.B12 | length 83.8
  Top Layer w0.381: v1(104.3,131.9) 105.125,132.725 R50.2@105.95,132.725 108.375,132.725 109.6,131.5 v1(121.1,131.5)
  Bottom Layer w0.381: U13.18@103.125,127.475 103.125,129 104.3,130.175 v1(104.3,131.9) ; v1(121.1,131.5) 156.2,131.5 162.7,125 162.7,110 161.6,108.9 X1.B12@161.2,108.9
PUMP_EN: MCU.3 U9.6 | length 40.7
  Top Layer w0.254: v1(96.6,68.3) 96.614,68.314 107.314,68.314 113.56,74.56 117.46,74.56 121.475,78.575 MCU.3@121.475,83.35
  Bottom Layer w0.254: U9.6@91.05,71.25 92.75,71.25 94.2,69.8 95.1,69.8 v1(96.6,68.3)
PUMP_EN_OUT: R58.2 U9.2 X1.A20 | length 99.3
  Top Layer w0.254: v1(97.35,73.3) 95.3,73.3 89.2,67.2 89.2,64.3 96.1,57.4 150.1,57.4 v1(154.5,61.8)
  Bottom Layer w0.254: U9.2@94.15,71.75 97.275,71.75 R58.2@97.3,71.775 97.35,71.825 v1(97.35,73.3) ; v1(154.5,61.8) 154.8,61.5 159.3,61.5 160.6,62.8 162.1,62.8 163.7,64.4 X1.A20@164.2,64.4
PWR: "PTC Fuse.1" X1.A28 X1.A29 X1.A30 | length 34.7
  Top Layer w2.43: 166.65,37.5 166.65,50.75 169.7,53.8 169.7,61.3 168.1,62.9 X1.A28@166.7,62.9 X1.A29@166.7,65.9
  Bottom Layer w2.43: X1.A29@166.7,65.9 X1.A30@166.7,68.9
REDUN_1_MCU: MCU.39 U14.3 | length 16
  Top Layer w0.254: U14.3@120.62,109 120.62,107.58 124.975,103.225 MCU.39@124.975,94.85
REDUN_2_MCU: MCU.38 U14.5 | length 15.1
  Top Layer w0.254: U14.5@123.16,109 123.16,105.84 125.475,103.525 MCU.38@125.475,94.85
RESET: C9.2 FLASH.10 MCU.63 | length 92
  Top Layer w0.254: v1(104.2,76.5) 106,76.5 106.6,77.1 106.6,78.3 107.16,78.86 FLASH.10@108.65,78.86 113.56,78.86 115.7,81 115.7,85.4 116.15,85.85 MCU.63@118.475,85.85
  Bottom Layer w0.254: C9.2@86.6,139.8 86.6,138.2 89.1,135.7 89.1,102.3 102.9,88.5 102.9,77.8 v1(104.2,76.5)
RTDS_5V: MCU.44 U13.7 | length 39.4
  Top Layer w0.254: v1(106.6,110) 111.1,105.5 119.8,105.5 121.7,103.6 121.7,97.725 122.475,96.95 MCU.44@122.475,94.85
  Bottom Layer w0.254: U13.7@98.045,118.125 98.045,116.955 98.6,116.4 100.2,116.4 v1(106.6,110)
RTDS_12V: R52.2 U13.14 X1.A32 | length 304
  Top Layer w0.254: v1(97.6,129.4) 98.3,129.4 98.8,129.9 98.8,132.4 98.425,132.775 R52.2@97.3,132.775 95.625,132.775 94.1,134.3 90.6,134.3 80.1,123.8 80.1,101.5 73,94.4 73,18.3 82.5,8.8 150.6,8.8 170.6,28.8 170.6,50.6 175.8,55.8 175.8,69.8 169.1,76.5 v1(168,76.5)
  Bottom Layer w0.254: v1(97.6,129.4) 98.045,128.955 U13.14@98.045,127.475 ; X1.A32@166.7,74.9 168,76.2 v1(168,76.5)
SENSE_REF: C29.2 R59.1 R60.2 U7.8 | length 9.8
  Top Layer w0.381: U7.8@137.405,161.275 137.405,159.695 138.575,158.525 R60.2@139.835,158.525 R59.1@142.335,158.525 C29.2@142.335,161.31
TS_LIVE_5V: MCU.11 R46.2 U11.13 | length 18.5
  Top Layer w0.254: MCU.11@125.475,83.35 125.475,74.525 126.725,73.275 R46.2@127.6,73.275 128.525,72.35 v1(129.2,72.35)
  Bottom Layer w0.254: v1@129.2,72 131.925,69.275 U11.13@131.925,68.475
  Bottom Layer w0.381: v1@129.2,72 v1(129.2,72.35)
TS_LIVE_12V: U11.9 X1.B7 | length 93.1
  Top Layer w0.254: v1(123.9,61) v1(130.6,61) ; v1(133.9,97.7) 134,97.7 v1(136.7,100.4) ; v1(151.3,111.8) 152.9,113.4 X1.B7@158.7,113.4
  Bottom Layer w0.254: v1(123.9,61) 122.3,62.6 122.3,80.53 119.4,83.43 119.4,93.6 122.8,97 133.2,97 v1(133.9,97.7) ; v1(130.6,61) 130.6,59.18 U11.9@130.655,59.125 ; v1(136.7,100.4) 137.5,101.2 144.975,101.2 151.3,107.525 v1(151.3,111.8)
TS_RDY_5V: MCU.54 R41.2 U10.14 | length 34.9
  Top Layer w0.254: U10.14@88.2,85.745 92.055,85.745 93.9,83.9 R41.2@93.9,83.05 96.55,83.05 103.85,90.35 MCU.54@118.475,90.35
TS_RDY_12V: LATCH_RELAY.6 U10.7 X1.A27 | length 196.2
  Top Layer w0.543: U10.7@78.85,85.745 77.445,85.745 76.8,85.1 76.8,17.9 82.8,11.9 v1(84.3,11.9)
  Bottom Layer w0.543: v1(84.3,11.9) 97.9,11.9 103.9,17.9 109.171,17.9 LATCH_RELAY.6@111.821,15.25
  Bottom Layer w2.43: LATCH_RELAY.6@111.821,15.25 115.571,11.5 127.8,11.5 132.364,16.064 132.364,20.464 164.308,52.408 165.49,52.408 169.4,56.318 169.4,58.2 167.7,59.9 X1.A27@166.7,59.9
TS_RDY_SNS: U11.7 X1.B5 | length 93.1
  Top Layer w0.254: v1(125,62) 125.3,61.7 132.4,61.7 v1(133.2,60.9) ; v1(136.6,97.6) 139.3,100.3 v1(139.4,100.3)
  Bottom Layer w0.254: v1(125,62) 125,61.9 122.8,64.1 122.8,80.7 119.8,83.7 119.8,93.4 122.9,96.5 135.5,96.5 v1(136.6,97.6) ; U11.7@133.195,59.125 133.25,59.18 133.2,59.23 v1(133.2,60.9) ; v1(139.4,100.3) 139.4,100.4 139.5,100.5 152.46,100.5 154.86,102.9 159.2,102.9 160.1,103.8 160.1,104.975 158.7,106.375 X1.B5@158.7,107.4
TS_RDY_SNS_OUT: MCU.12 R45.2 U11.14 | length 23
  Top Layer w0.254: MCU.12@125.975,83.35 125.975,75.925 126.8,75.1 132,75.1 133,74.1 R45.2@133,73.175 132.125,72.3 v1(131.4,72.3)
  Bottom Layer w0.254: v1(131.4,72.3) 131.4,70.6 131.8,70.2 132.4,70.2 133.195,69.405 U11.14@133.195,68.475
VCC_3V3: C11.2 FTDI.17 | length 3.1
  Top Layer w0.381: FTDI.17@82.775,147.625 82.825,147.575 v1(84.4,147.575)
  Bottom Layer w0.381: v1(84.4,147.575) C11.2@85.9,147.575
pads on no net: BRAKE_FRONT_POT.3 BRAKE_REAR_POT.2 FLASH.7 FLASH.9 FLASH.MH1 FLASH.MH2 FTDI.3 FTDI.6 FTDI.8 FTDI.9 FTDI.10 FTDI.11 FTDI.12 FTDI.13 FTDI.14 FTDI.24 FTDI.27 FTDI.28 J1.4 J1.6 J1.7 J1.8 J1.9 J1.10 J1.11 LATCH_RELAY.7 MC_PWR_SWITCH.3 MCU.15 MCU.17 MCU.18 MCU.19 MCU.20 MCU.21 MCU.25 MCU.50 MCU.55 MCU.56 MCU.57 MCU.60 U2.3 U2.11 U4.3 U4.5 U4.6 U7.3 U7.4 U7.5 U10.4 U10.8 U10.9 U10.13 U11.4 U11.8 U12.4 U12.8 U13.4 U13.8 U14.4 U14.8 X1.A12 X1.A21 X1.B6 X1.B8 X1.B9 X1.B10 X1.B15 X1.B16 X1.B17 X1.B18 X1.B24 X1.CH X1.LH X1.RH Y1.NC Y2.NC Y3.NC Y4.NC Y5.NC

## Polygon pours and split planes (outlines as drawn)
DGND on Bottom Layer "DGND_BOT" (solid, pour order 18): 69,182.5 177.5,182.5 177.5,3.5 69,3.5
AGND on Bottom Layer "AGND_BOT" (solid, pour order 6): 108.9,133.3 108.9,182.5 168,182.5 168,133.3
DGND on Top Layer "DGND_TOP" (solid, pour order 16): 69,182.5 177.5,182.5 177.5,3.5 69,3.5
AGND on Top Layer "AGND_TOP" (solid, pour order 12): 108.9,182.5 168,182.5 168,133.3 108.9,133.3

## Silkscreen, mask and mechanical layers (free items; w line width, h text height)
Top Overlay:
  text "a" at 112.43,197.253 h32 r180
  text "Design and Layout by: Jonathan Lau" at 112.1,174.4 h1 r180

## Text inside footprints (layer, text, board x,y; h text height)
X1: Top Overlay "SUPER SEAL 60POS" at 155.166,53.206 h1.52 r90